# Altium PCB ArduinoUnoQ.PcbDoc
Units mil, origin at the board's own origin, x right, y up, seen from the top; angles counter-clockwise.
Board outline 2698.82 x 2101.51 mil, 2 copper layers (Top Layer, Bottom Layer), stack 62.249 mil thick; 41 components, 18 nets, 142 pads, 311 vias.
Unrouted connection lines stored in the file: 67.
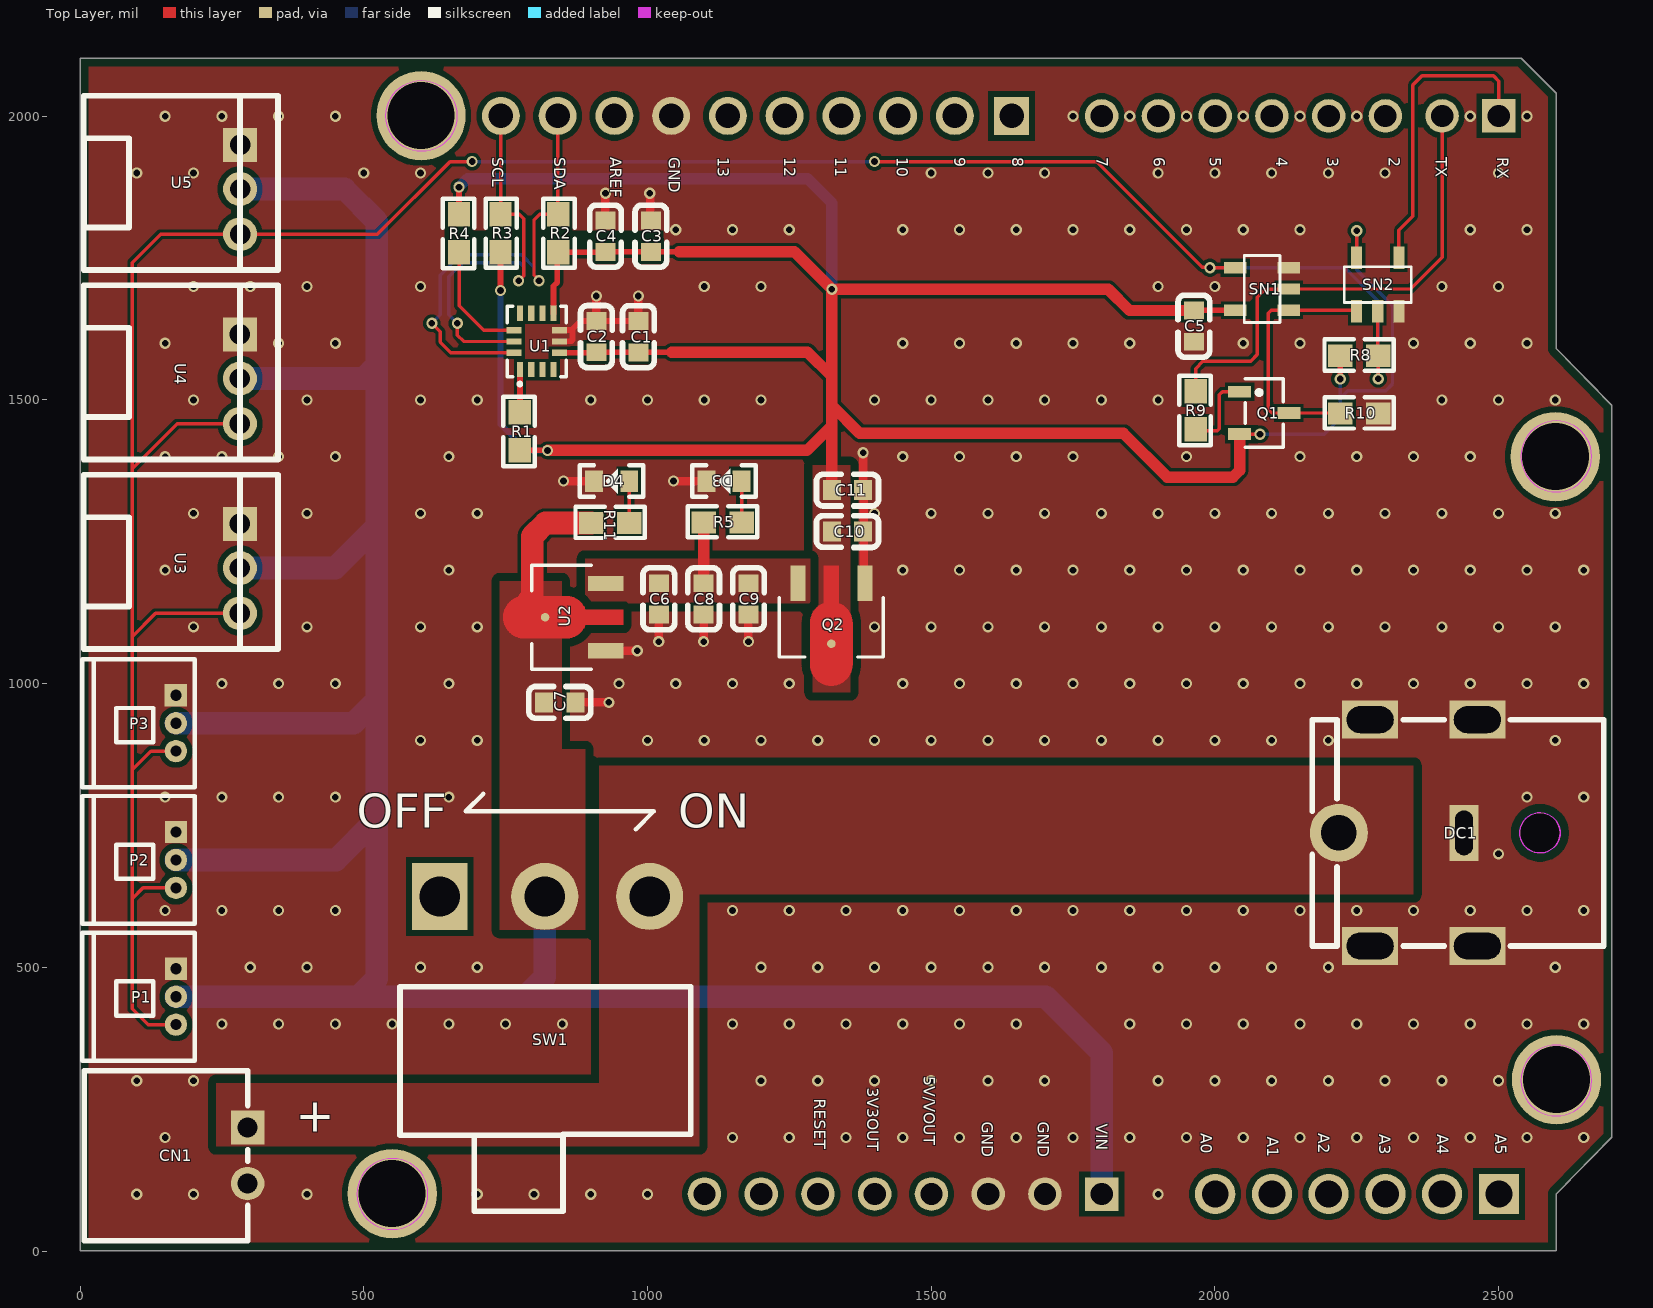
[diagram p0: Top Layer view]
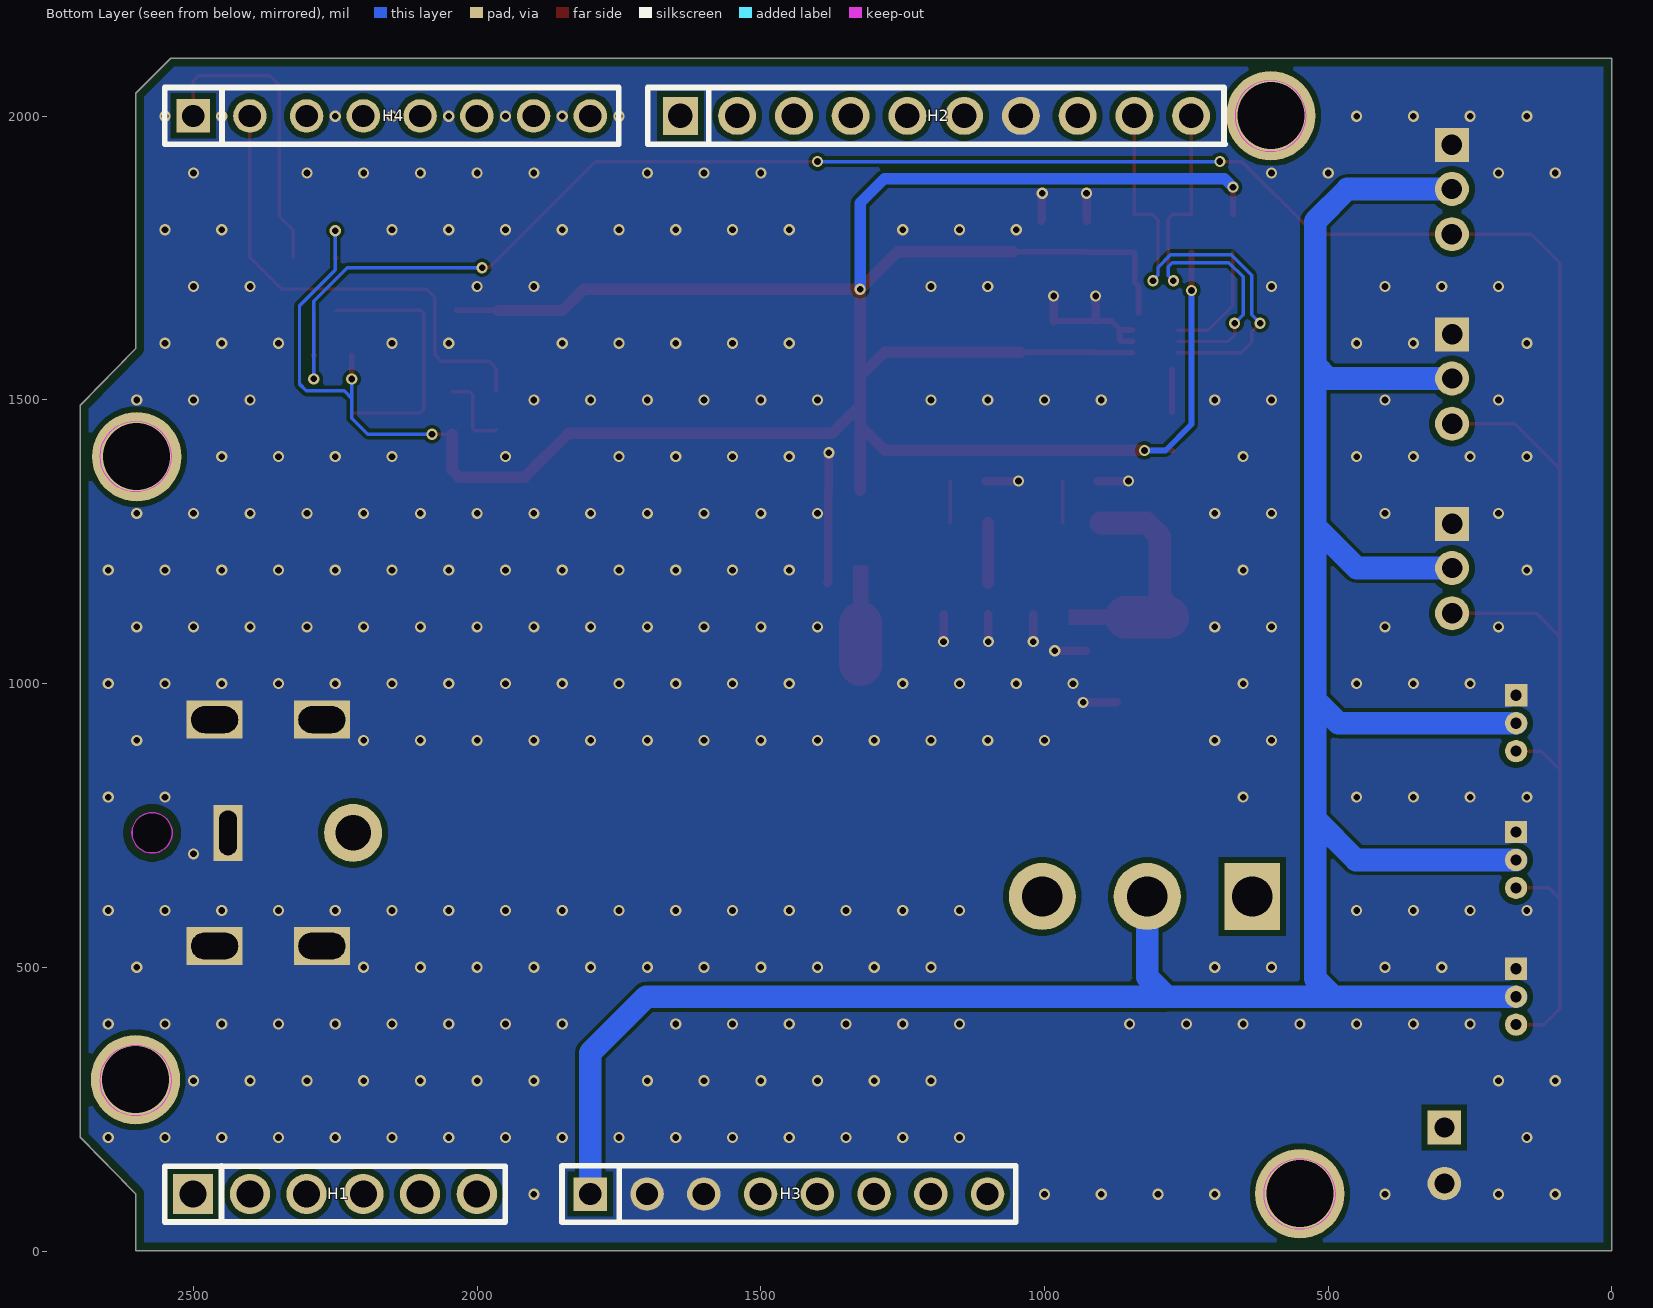
[diagram p1: Bottom Layer view, seen from below]
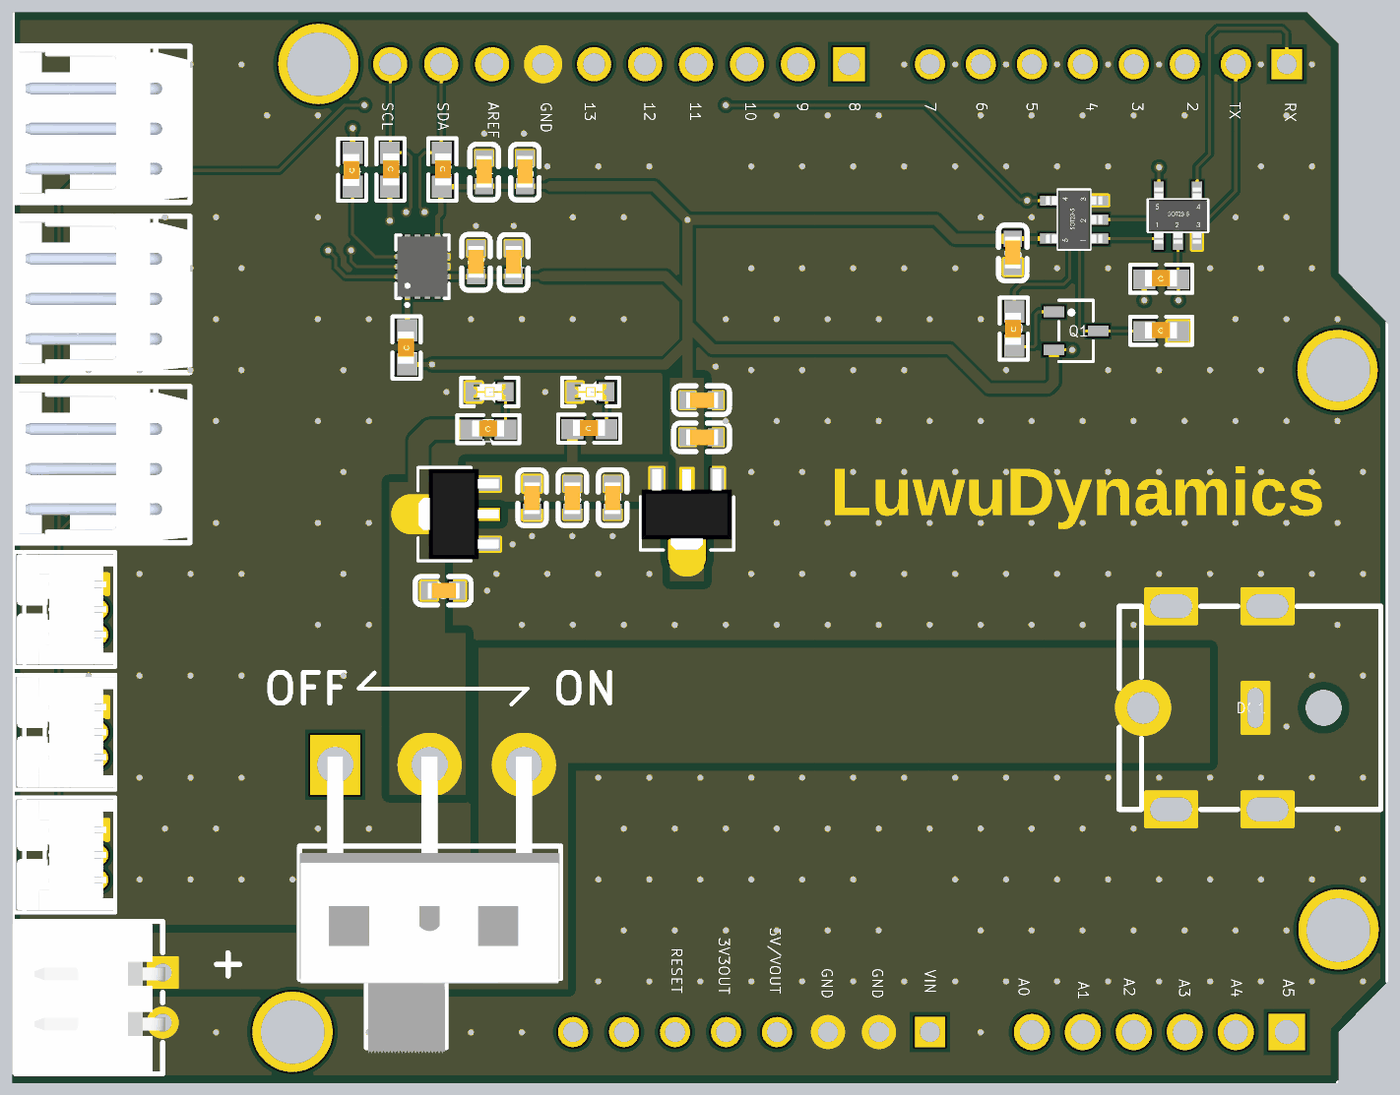
[diagram p2: 3D render of the assembled board from above, using the file's embedded part models]

## Layer stack, top to bottom
Top Solder: solder mask 0.4, Solder Resist, Dk 3.5
Top Layer: signal copper 1.4
Dielectric 1: dielectric 59.4488, FR-4, Dk 4.8
Bottom Layer: signal copper 1.4
Bottom Solder: solder mask 0.4, Solder Resist, Dk 3.5

## Board outline
0.5,0.5 0.5,2102.01 2540.08,2102.01 2601.68,2040.41 2601.68,1590.5 2699.32,1490.5 2699.32,200.5 2601.68,100.5 2601.68,0.5
cut-out: 2539.18,1400.5 ccw(c2601.68,1400.5) 2601.68,1338 ccw(c2601.68,1400.5) 2664.18,1400.5 ccw(c2601.68,1400.5) 2601.68,1463 ccw(c2601.68,1400.5)
cut-out: 2539.18,300.5 ccw(c2601.68,300.5) 2601.68,238 ccw(c2601.68,300.5) 2664.18,300.5 ccw(c2601.68,300.5) 2601.68,363 ccw(c2601.68,300.5)
cut-out: 488,100.5 ccw(c550.5,100.5) 550.5,38 ccw(c550.5,100.5) 613,100.5 ccw(c550.5,100.5) 550.5,163 ccw(c550.5,100.5)
cut-out: 601.68,1938 cw(c601.68,2000.5) 539.18,2000.5 cw(c601.68,2000.5) 601.68,2063 cw(c601.68,2000.5) 664.18,2000.5 cw(c601.68,2000.5)

## Design rules (kind name [scope] priority, off if disabled: settings)
BoardOutlineClearance [All] p1: gap=15 ignorepadtopadclearanceinfootprint=FALSE
Clearance [All] p1: gap=6 ignorepadtopadclearanceinfootprint=FALSE except(10: THPad-Fill THPad-Poly THPad-Region; 15: Fill-Fill Fill-Poly Fill-Region Poly-Poly Poly-Region Region-Region)
MinimumSolderMaskSliver [All] p1: minsoldermaskwidth=0
PolygonConnect [All] p1: connectstyle=Direct reliefconductorwidth=10 reliefentries=4 polygonreliefangle="90 Angle" airgapwidth=10
RoutingVias [All] p1: holewidth=11.81 width=19.68 viastyle="Through Hole" minholewidth=7.87 minwidth=19.68 maxholewidth=28 maxwidth=50
SilkToSilkClearance [All] p1: silktosilkclearance=0
SilkToSolderMaskClearance [IsPad] p1: minsilkscreentomaskgap=0 clearancetoexposedcopper=TRUE
SolderMaskExpansion SolderMask_Pad [IsPad] p1: expansion=4 istentingtop=FALSE
SolderMaskExpansion SolderMask_Via_Tenting [IsVia] p2: expansion=0 istentingtop=TRUE
SolderMaskExpansion [All] p3: expansion=4 istentingtop=FALSE
SupplyNets "Schematic Supply Nets_4" [InNet('VCC8.4V')] p1: voltage=0.000
SupplyNets "Schematic Supply Nets_3" [InNet('Power')] p2: voltage=0.000
SupplyNets "Schematic Supply Nets_2" [InNet('GND')] p3: voltage=0.000
SupplyNets "Schematic Supply Nets_1" [InNet('VCC5V')] p4: voltage=0.000
SupplyNets "Schematic Supply Nets" [InNet('VDD3V3')] p5: voltage=0.000
Width [All] p1: maxlimit=100 minlimit=6 preferedwidth=6
27 further rules are at their usual default settings.

## Classes and differential pairs
component class ArduinoUnoQ: C8 CN1 D3 D4 DC1 H1 H2 H3 H4 P1 P2 P3 Q1 Q2 SN1 SN2 SW1 U3 U4 U5

## Components (designator, comment, footprint, x,y, rotation, side; value= is the part's Value field where it differs from the comment)
C1 "0603 C" C0603#1 984,1611.44 r270 top value=10uF/25V
C2 "0603 C" C0603#1 910,1611.56 r270 top value=100nF/25V
C3 "0603 C" C0603#1 1006,1788.56 r270 top value=10uF/25V
C4 "0603 C" C0603#1 926,1788.56 r270 top value=100nF/25V
C5 "100nF/25V" C0603#2 1963,1630 r270 top
C6 "0603 C" C0603#3 1020,1149.44 r90 top value=6.8uF/25V
C7 "0603 C" C0603#3 845.56,967 r180 top value=1uF/25V
C8 "0603 C" C0603#1 1099,1149.44 r90 top value=10uF/25V
C9 "0603 C" C0603#1 1178,1149.44 r90 top value=100nF/25V
C10 "0603 C" C0603#1 1352.56,1268 r180 top value=10uF/25V
C11 "0603 C" C0603#1 1352.56,1341 r180 top value=100nF/25V
CN1 "ZX-XH2.54-2PWZ" CONN-TH_2P-P2.50_ZX-XH2.54-2PWZ 295.39,168.2 r270 top
D3 "LED/R" D_SOD_523 1134.9,1357 r180 top
D4 "LED/R" D_SOD_523 936.9,1357 r180 top
DC1 "kh-dc-007b-2.1g" DC-IN-TH_KH-DC-007B-2.1G 2340.58,737 r270 top
H1 "pz254v-11-06p" HDR-TH_6P-P2.54-V-M-1 2250.5,100.5 r180 bottom
H2 "pz254v-11-10p" HDR-TH_10P-P2.54-V-M 1191.68,2000.5 r180 bottom
H3 "pz254v-11-08p" HDR-TH_8P-P2.54-V-M 1450.5,100.5 r180 bottom
H4 "pz254v-11-08p" HDR-TH_8P-P2.54-V-M 2150.5,2000.5 r180 bottom
P1 "Header 3" "MX 1.25-WI-3P" 169,448.21 r270 top
P2 "Header 3" "MX 1.25-WI-3P" 169,689.21 r270 top
P3 "Header 3" "MX 1.25-WI-3P" 168.94,930.21 r270 top
Q1 "BC807" SOT-23-3 2087,1477 r180 top
Q2 "AMS1117-3.3V" SOT-89-3_L4.5-W2.5-P1.50-LS4.2-BR 1324.06,1123.61 r90 top
R1 "10K" R0603#1 775,1444.54 r90 top
R2 "4.7K/±1%" R0603#1 843,1793.54 r270 top
R3 "4.7K/±1%" R0603#1 741,1793.54 r270 top
R4 "4.7K/±1%" R0603#1 668,1793.46 r90 top
R5 "10K/±1%" R0603#2 1132.46,1284 r0 top
R8 "10K/±1%" R0603#1 2254.46,1578 r0 top
R9 "1K/±1%" R0603#2 1966,1481.54 r90 top
R10 "3.3K/±1%" R0603#2 2254.54,1476 r0 top
R11 "20K/±1%" R0603#1 934.46,1283 r0 top
SN1 "SN74LVC1G126" SOT_23_5 2130.49,1658 r90 top
SN2 "SN74LVC1G125" SOT_23_5 2249.6,1656 r0 top
SW1 "SS-12D06L5" SW-TH_3P-P4.70_L11.1-W12.7 819,625 r0 top
U1 "QMI8658A" LGA-14_L3.0-W2.5-P0.50-TL 805,1603 r90 top
U2 "h7651-50pr" SOT-89-3_L4.5-W2.5-P1.50-LS4.2-BR 873,1117 r0 top
U3 "292253-3" CONN-TH_3P-P2.00_TE_292253-3 281.85,1202.74 r270 top
U4 "292253-3" CONN-TH_3P-P2.00_TE_292253-3 281.85,1536.74 r270 top
U5 "292253-3" CONN-TH_3P-P2.00_TE_292253-3 282,1870.74 r270 top locked

## Footprints (in the part's own frame and the unit in brackets; to place one, negate y for a bottom-side part, rotate by r counter-clockwise, add the part's x,y. Pads: shape width x height; smd on the part's side, far side on the other; paste and mask are expansions set on the pad)
C0603#1 [mm] "C0603"
  rect 0.8x0.9 smd paste+0 mask+0.051: 1(-0.7,0) 2(0.7,0)
  silkscreen extent -1.39,-0.71 1.39,0.71, body extent -0.83,-0.4 0.77,0.4, height 0.4
C0603#2 [mm] "C0603"
  rect 0.8x0.9 smd paste+0 mask+0.102: 1(-0.7,0) 2(0.7,0)
  silkscreen extent -1.39,-0.71 1.39,0.71, body extent -0.83,-0.4 0.77,0.4, height 0.4
C0603#3 [mm] "C0603"
  rect 0.8x0.9 smd: 1(-0.7,0) 2(0.7,0)
  silkscreen extent -1.39,-0.71 1.39,0.71, body extent -0.83,-0.4 0.77,0.4, height 0.4
CONN-TH_2P-P2.50_ZX-XH2.54-2PWZ [mil]
  rect 60x59.1 hole 35.4 paste-99999 mask+2: 1(-49.2,0)
  round 59.1 hole 35.4 paste-99999 mask+2: 2(49.2,0)
  silkscreen extent -150,-288 150,0, body extent -145,-295 151,5, height 234
CONN-TH_3P-P2.00_TE_292253-3 [mil]
  rect 60x60 hole 36: 1(-78.74,0)
  round 60 hole 36: 2(-1,0) 3(78.74,0)
  silkscreen extent -165,-276 142,67, body extent -169,-279 139,68, height 157
D_SOD_523 [mm] "LED"
  rect 0.8x0.96 smd: 1(-0.79,0) 2(0.79,0)
  silkscreen extent -1.42,-0.71 1.42,0.71, body extent -0.8,-0.4 0.8,0.4, height 0.47
DC-IN-TH_KH-DC-007B-2.1G [mm]
  rect 1.7x2.5 hole 1.2 slot 2.1 at 90 deg: 2(-5.065,3.1) 2(-5.065,-1.7) 2(5.065,3.1) 2(5.065,-1.7)
  rect 2.5x1.3 hole 0.8 slot 2 at 0 deg: 3(0,2.5)
  round 2.6 hole 1.6: 4(0,-3.1)
  Keep-Out Layer board cut-out: 0.9,5.9 0.9,5.781 0.839,5.553 0.72,5.347 0.553,5.18 0.347,5.061 0.118,5 -0.118,5 -0.347,5.061 -0.553,5.18 -0.72,5.347 -0.839,5.553 -0.9,5.781 -0.9,5.9 -0.9,6.018 -0.839,6.247 -0.72,6.453 -0.553,6.62 -0.347,6.739 -0.118,6.8 0.118,6.8 0.347,6.739 0.553,6.62 0.72,6.453 0.839,6.247 0.9,6.018 0.9,5.9 0.9,5.9
  Keep-Out Layer circle w0.003: c0,5.9 r0.9
  Keep-Out Layer region: 0.9,5.9 0.9,5.781 0.839,5.553 0.72,5.347 0.553,5.18 0.347,5.061 0.118,5 -0.118,5 -0.347,5.061 -0.553,5.18 -0.72,5.347 -0.839,5.553 -0.9,5.781 -0.9,5.9 -0.9,6.018 -0.839,6.247 -0.72,6.453 -0.553,6.62 -0.347,6.739 -0.118,6.8 0.118,6.8 0.347,6.739 0.553,6.62 0.72,6.453 0.839,6.247 0.9,6.018 0.9,5.9 0.9,5.9
  Keep-Out Layer region: 0.9,5.9 0.89,5.766 0.86,5.635 0.811,5.509 0.744,5.393 0.66,5.288 0.561,5.196 0.45,5.12 0.329,5.062 0.2,5.022 0.067,5.002 -0.067,5.002 -0.2,5.022 -0.329,5.062 -0.45,5.12 -0.561,5.196 -0.66,5.288 -0.744,5.393 -0.811,5.509 -0.86,5.635 -0.89,5.766 -0.9,5.9 -0.89,6.034 -0.86,6.165 -0.811,6.29 -0.744,6.407 -0.66,6.512 -0.561,6.604 -0.45,6.679 -0.329,6.738 -0.2,6.777 -0.067,6.797 0.067,6.797 0.2,6.777 0.329,6.738 0.45,6.679 0.561,6.604 0.66,6.512 0.744,6.407 0.811,6.29 0.86,6.165 0.89,6.034 0.9,5.9
  silkscreen extent -5.07,-4.29 5.06,8.75, body extent -5.01,-4.29 5,8.71, height 10.08
HDR-TH_6P-P2.54-V-M-1 [mm]
  rect 1.8x1.8 hole 1.2 mask+0.102: 1(-6.35,0)
  round 1.8 hole 1.2 mask+0.102: 2(-3.81,0) 3(-1.27,0) 4(1.27,0) 5(3.81,0) 6(6.35,0)
  silkscreen extent -7.62,-1.25 7.62,1.25
HDR-TH_8P-P2.54-V-M [mm]
  rect 1.5x1.5 hole 1 mask+0.102: 1(-8.89,0)
  round 1.5 hole 1 mask+0.102: 2(-6.35,0) 3(-3.81,0) 4(-1.27,0) 5(1.27,0) 6(3.81,0) 7(6.35,0) 8(8.89,0)
  silkscreen extent -10.16,-1.27 10.16,1.27
HDR-TH_10P-P2.54-V-M [mm]
  rect 1.575x1.7 hole 1.1 mask+0.102: 1(-11.43,0)
  round 1.7 hole 1.1 mask+0.102: 2(-8.89,0) 3(-6.35,0) 4(-3.81,0) 5(-1.27,0) 6(1.27,0) 7(3.81,0) 8(6.35,0) 9(8.89,0) 10(11.43,0)
  silkscreen extent -12.9,-1.27 12.95,1.27
LGA-14_L3.0-W2.5-P0.50-TL [mm] "ICM42670六轴陀螺仪"
  rect 0.675x0.28 smd paste+0 mask+0.051: 1(-1.262,0.75) 2(-1.262,0.25) 3(-1.262,-0.25) 4(-1.262,-0.75) 8(1.262,-0.75) 9(1.262,-0.25) 10(1.262,0.25) 11(1.262,0.75)
  rect 0.28x0.675 smd paste+0 mask+0.051: 5(-0.5,-1.012) 6(0,-1.012) 7(0.5,-1.012) 12(0.5,1.012) 13(0,1.012) 14(-0.5,1.012)
  silkscreen extent -1.98,-1.33 1.58,1.33, body extent -1.5,-1.25 1.5,1.25, height 0.91
"MX 1.25-WI-3P" [mm] "长：5.5mm，宽：1.8mm，高：3.3mm"
  rect 1x1 hole 0.5: 1(-1.25,0)
  round 1 hole 0.5: 2(0,0) 3(1.25,0)
  silkscreen extent -2.86,-4.19 2.86,0.85, body extent -2.75,-4.05 2.75,0.85, height 3.35
R0603#1 [mm] "贴片电阻"
  rect 1.1x1 smd: 1(-0.85,0) 2(0.85,0)
  silkscreen extent -1.56,-0.67 1.54,0.73, body extent -0.81,-0.34 0.79,0.47, height 0.88
R0603#2 [mm] "贴片电阻"
  rect 1.1x1 smd mask+0.102: 1(-0.85,0) 2(0.85,0)
  silkscreen extent -1.56,-0.67 1.54,0.73, body extent -0.81,-0.34 0.79,0.47, height 0.88
SOT-23-3 [mil] "MMBT2907A"
  rect 40.85x20.95 smd paste+0 mask+4: 1(43.36,-37.4) 2(43.36,37.4) 3(-43.36,0)
  silkscreen extent -34,-60 34,60, body extent -33,-58 20,58, height 10
SOT-89-3_L4.5-W2.5-P1.50-LS4.2-BR [mm]
  rect 1.575x0.672 smd: 1(1.356,-1.5) 3(1.356,1.5)
  round 0.38 smd: 2(-1.356,0)
  Top Layer region: -2.283,0.95 -0.429,0.95 -0.384,0.949 -0.34,0.946 -0.296,0.94 -0.252,0.933 -0.208,0.924 -0.165,0.912 -0.123,0.899 -0.081,0.884 -0.04,0.866 0,0.847 0.04,0.826 0.078,0.803 0.115,0.779 0.151,0.752 0.185,0.724 0.219,0.695 0.251,0.664 0.281,0.631 0.31,0.597 0.337,0.562 0.362,0.525 0.386,0.488 0.408,0.449 0.428,0.409 0.447,0.33 2.144,0.33 2.144,-0.33 0.447,-0.33 0.428,-0.409 0.408,-0.449 0.386,-0.488 0.362,-0.526 0.337,-0.562 0.31,-0.597 0.281,-0.631 0.251,-0.664 0.219,-0.695 0.185,-0.725 0.151,-0.753 0.115,-0.779 0.078,-0.804 0.04,-0.827 0,-0.848 -0.04,-0.867 -0.081,-0.884 -0.123,-0.899 -0.165,-0.913 -0.208,-0.924 -0.252,-0.934 -0.296,-0.941 -0.34,-0.946 -0.384,-0.949 -0.429,-0.95 -2.283,-0.95 -2.328,-0.949 -2.372,-0.946 -2.416,-0.941 -2.46,-0.934 -2.504,-0.924 -2.547,-0.913 -2.589,-0.899 -2.631,-0.884 -2.672,-0.867 -2.713,-0.848 -2.752,-0.827 -2.79,-0.804 -2.827,-0.779 -2.863,-0.753 -2.898,-0.725 -2.931,-0.695 -2.963,-0.664 -2.993,-0.631 -3.022,-0.597 -3.049,-0.562 -3.075,-0.526 -3.098,-0.488 -3.12,-0.449 -3.141,-0.409 -3.159,-0.369 -3.175,-0.327 -3.189,-0.285 -3.202,-0.242 -3.212,-0.199 -3.22,-0.155 -3.227,-0.111 -3.231,-0.067 -3.233,-0.022 -3.233,0.022 -3.231,0.067 -3.227,0.111 -3.22,0.155 -3.212,0.199 -3.202,0.242 -3.189,0.285 -3.175,0.327 -3.159,0.369 -3.141,0.409 -3.12,0.449 -3.098,0.488 -3.075,0.525 -3.049,0.562 -3.022,0.597 -2.993,0.631 -2.963,0.664 -2.931,0.695 -2.898,0.724 -2.863,0.752 -2.827,0.779 -2.79,0.803 -2.752,0.826 -2.713,0.847 -2.672,0.866 -2.631,0.884 -2.589,0.899 -2.547,0.912 -2.504,0.924 -2.46,0.933 -2.416,0.94 -2.372,0.946 -2.328,0.949 -2.283,0.95
  silkscreen extent -1.95,-2.33 0.7,2.33, body extent -1.92,-2.24 2.08,2.26, height 1.5
SOT_23_5 [mm]
  rect 0.5x1 smd mask+0.102: 1(0,0) 2(0.95,0) 3(1.9,0) 4(1.9,2.4) 5(0,2.4)
  silkscreen extent -0.55,0.4 2.45,2, body extent -0.5,-0.2 2.4,2.6, height 1.09
SW-TH_3P-P4.70_L11.1-W12.7 [mil]
  rect 98.4x118.1 hole 70.9: 1(-185.1,0)
  round 118.1 hole 70.9: 2(0,0) 3(185,0)
  silkscreen extent -255,-555 257,-159, body extent -255,-566 255,16, height 281

## Part data
C1 C2 C3 C4 C6 C7 C8 C9 C10 C11: "0603贴片电容，±10%，50V", LatestRevisionDate=17-Jul-2002, LatestRevisionNote="Re-released for DXP Platform.", PackageDescription="Radial Cap, Thru-Hole; 2 Leads; 0.3 in Pin Spacing", PackageReference=RAD-0.3, Published=8-Jun-2000, Publisher="Altium Limited"
C5: library part "0603 10nF (103) 10% 50V", "贴片电容", Package=0603, SuppliersPartNumber=C57112, ComponentLink1Description=供应商链接, ComponentLink1URL=http://www.szlcsc.com/product/details_58143.html, Supplier=LC
CN1: "插针结构:1x2P;间距:2.5mm;安装方式:弯插;参考系列:XH;总PIN数:2P;排数:1;每排PIN数:2;行距:-;额定电流:2A;触头材质:黄铜;触头镀层:锡;工作温度:-25℃~+85℃;", Color=白色, Current Rating=2A, Flame Retardant Rating=UL94V-0, JLCPCB Part Class="Extended Part", LCSC Part Name="1x2P 间距:2.5mm 弯插 系列:XH", Manufacturer=Megastar(兆星), Operating Temperature=-25℃~+85℃, Voltage Rating=250V, AddInBom=yes, Contact Material=黄铜, Contact Plating=锡, ConvertToPcb=yes, Datasheet=https://item.szlcsc.com/datasheet/ZX-XH2.54-2PWZ/8427558.html, Device=ZX-XH2.54-2PWZ, FootprintName=CONN-TH_2P-P2.50_ZX-XH2.54-2PWZ, ManufacturerPart=ZX-XH2.54-2PWZ, ModelId=24f25f0d7a3348c685f49f501f04732c聨0819f05c4eef4c71ace90d822a990e87, ModelName=CONN-TH_2P-P2.50_ZX-XH2.54-2PWZ, ModelTransform=295.669,300.7868,0,0,0,0,0,-137.795,-133.858, Mounting Type=弯插, Number of Pins=2P, Number of PINs Per Row=2, Number of Rows=1, Pins Structure=1x2P, Pitch=2.5mm, Plastic Material=PA66, Reference Series=XH, Row Spacing=-, Supplementary Features=-, Supplier=LCSC, Supplier Footprint=弯插,P=2.5mm, SupplierPart=C7429641, Symbol=ZX-XH2.54-2PWZ, X-Length of Bottom Edge on Board (Spacing Line)=7.5mm, Y-Width of Bottom Edge on Board=7.32mm, Z-Height of the Board=5.9mm
D3 D4: library part LED, "Typical INFRARED GaAs LED", LatestRevisionDate=08-Jul-2005, LatestRevisionNote="Mech Layer 1 removed.", PackageDescription="LED; 2 Leads", PackageReference=LED-0, Published=8-Jun-2000, Publisher="Altium Limited"
DC1: "连接器类型:DC电源插座;安装方式:弯插;触点内径:-;触点外径:-;额定电流:3A;额定电压:50V;工作温度:-30℃~+70℃;", Current Rating=3A, JLCPCB Part Class="Extended Part", LCSC Part Name=DC电源插座, Manufacturer=kinghelm(金航标), ManufacturerPart=KH-DC-007B-2.1G, Operating Temperature=-30℃~+70℃, Voltage Rating (Max)=50V, AddInBom=yes, Body Height=10mm, Connector Type=DC电源插座, ConvertToPcb=yes, Datasheet=https://item.szlcsc.com/datasheet/KH-DC-007B-2.1G/3043197.html, FootprintName=DC-IN-TH_KH-DC-007B-2.1G, Inside Contact Diameter=-, Length=13mm, ModelId=db467a4a132a497c9fa96d37cafb49be, ModelName=DC-IN-TH_KH-DC-007B-2.1G, ModelTransform=511.81,393.7,0,270,0,0,0,90.551,-74.803, Mounting Type=弯插, Outside Contact Diameter=-, Supplier=LCSC, Supplier Footprint=插件, SupplierPart=C2847175, Symbol=KH-DC-007B-2.1G, Width=10.85mm
H1: "插针结构:1x6P;间距:2.54mm;行距:-;圆针/方针:方针;安装方式:直插;排数:单排;总PIN位数:6P;额定电流:3A;额定电压:-;配合针长度:6mm;塑高:2.5mm;端接针长度:3mm;触头材质:黄铜;触头镀层:金;工作温度:-40℃~+105℃;颜色:黑色;", Color=黑色, Current Rating=3A, JLCPCB Part Class="Extended Part", LCSC Part Name="1x6P 间距:2.54mm 方针 直插", Manufacturer=BOOMELE(博穆精密), ManufacturerPart=2.54-1x6P直针, Operating Temperature=-40℃~+105℃, Voltage Rating (Max)=-, AddInBom=yes, Circluar Pins/Square Pins=方针, Contact Material=黄铜, Contact Plating=金, ConvertToPcb=yes, Datasheet=https://item.szlcsc.com/datasheet/2.54-1x6P%25E7%259B%25B4%25E9%2592%2588/38187.html, FootprintName=HDR-TH_6P-P2.54-V-M-1, Insulation Height=2.5mm, Length of End Connection Pin=3mm, Length of Mating Pin=6mm, ModelId=60739dffc9b04830a286435b0fefbd4a, ModelName=HDR2.54-M-LI-1X6P, ModelTransform=599.999,100,0,0,0,0,0,0,-118.11, Mounting Type=直插, Number of Pins=6P, Number of Rows=单排, Pin Structure=1x6P, Pitch=2.54mm, Row Spacing=-, Supplier=LCSC, Supplier Footprint=插件,P=2.54mm, SupplierPart=C37208, Symbol=Header-Male-2.54_1x6
H2: "插针结构:1x10P;间距:2.54mm;行距:-;圆针/方针:方针;安装方式:直插;排数:单排;总PIN位数:10P;额定电流:3A;额定电压:250V;配合针长度:6mm;塑高:2.5mm;端接针长度:3mm;触头材质:黄铜;触头镀层:-;工作温度:-40℃~+105℃;颜色:黑色;", Color=黑色, Current Rating=3A, JLCPCB Part Class="Extended Part", LCSC Part Name="1x10P 间距:2.54mm 方针 直插", Manufacturer=XFCN(兴飞), ManufacturerPart=PZ254V-11-10P, Operating Temperature=-40℃~+105℃, Voltage Rating (Max)=250V, AddInBom=yes, Circluar Pins/Square Pins=方针, Contact Material=黄铜, Contact Plating=-, ConvertToPcb=yes, Datasheet=https://item.szlcsc.com/datasheet/PZ254V-11-10P/502965.html, FootprintName=HDR-TH_10P-P2.54-V-M, Insulation Height=2.5mm, Length of End Connection Pin=3mm, Length of Mating Pin=6mm, ModelId=10f3d1cea59e4bb4ba116af9f09c2b9b, ModelName=HDR2.54-M-LI-1X10P, ModelTransform=999.99796,100,0,0,0,0,0,0,-118.11, Mounting Type=直插, Number of Pins=10P, Number of Rows=单排, Pin Structure=1x10P, Pitch=2.54mm, Row Spacing=-, Supplier=LCSC, Supplier Footprint=插件,P=2.54mm, SupplierPart=C492409, Symbol=PZ254V-11-10P
H3 H4: "插针结构:1x8P;间距:2.54mm;行距:-;圆针/方针:方针;安装方式:直插;排数:单排;总PIN位数:8P;额定电流:3A;额定电压:250V;配合针长度:6mm;塑高:2.5mm;端接针长度:3mm;触头材质:黄铜;触头镀层:-;工作温度:-40℃~+105℃;颜色:黑色;", Color=黑色, Current Rating=3A, JLCPCB Part Class="Extended Part", LCSC Part Name="1x8P 间距:2.54mm 方针 直插", Manufacturer=XFCN(兴飞), ManufacturerPart=PZ254V-11-08P, Operating Temperature=-40℃~+105℃, Voltage Rating (Max)=250V, AddInBom=yes, Circluar Pins/Square Pins=方针, Contact Material=黄铜, Contact Plating=-, ConvertToPcb=yes, Datasheet=https://item.szlcsc.com/datasheet/PZ254V-11-08P/502963.html, FootprintName=HDR-TH_8P-P2.54-V-M, Insulation Height=2.5mm, Length of End Connection Pin=3mm, Length of Mating Pin=6mm, ModelId=f5b96e27511e49e38545e53df2320202, ModelName=HDR-TH_8P-P2.54-V-M, ModelTransform=807.87244,98.425,0,0,0,0,0,0,-118.11, Mounting Type=直插, Number of Pins=8P, Number of Rows=单排, Pin Structure=1x8P, Pitch=2.54mm, Row Spacing=-, Supplier=LCSC, Supplier Footprint=插件,P=2.54mm, SupplierPart=C492407, Symbol=PZ254V-11-08P
P1 P2 P3: "Header, 3-Pin", LatestRevisionDate=17-Jul-2002, LatestRevisionNote="Re-released for DXP Platform.", Publisher="Altium Limited"
Q1: library part "PNP 60V 600mA", "三极管BJT", ComponentLink1Description="Manufacturer Link", ComponentLink1URL=http://www.fairchildsemi.com/, ComponentLink2Description=Datasheet, ComponentLink2URL=http://www.fairchildsemi.com/ds/2N%2F2N3906.pdf, DatasheetVersion=1997, LatestRevisionDate=15-Jan-2003, LatestRevisionNote="PCB Footprint 'BCY-W3/D4.7' replaced", PackageDescription="TO, Flat Index; 3 In-Line, Axial Leads; Body Dia. 4.5mm; Leads 0.51 x 0.48 mm (max)", PackageReference=TO-92A, PackageVersion=Sep-1998, Published=8-Jun-2000, Publisher="Altium Limited"
Q2: library part AMS1117-3.3V_SOT89, "输入18V 输出3.3V 1A，SOT-89封装", JLCPCB Part Class="Extended Part", LCSC Part Name="输入18V 输出3.3V 1A", Manufacturer=MSKSEMI(美森科), Operating Temperature=0℃~+125℃, Output Current=1A, Output Voltage=3.3V, standby current=12mA, Voltage - Supply=18V, Voltage Dropout=1.4V@(1A), Add into BOM=yes, Convert to PCB=yes, Datasheet=https://atta.szlcsc.com/upload/public/pdf/source/20240731/7960C38D2F7D4AC8FF3CFA386029A4C5.pdf, Device=AMS1117-3.3V_C5120796, Manufacturer Part=AMS1117-3.3V, Number of Outputs=1, Output Configuration=正极, Output Type=固定, Supplier=LCSC, Supplier Footprint=SOT-89, Supplier Part=C5120796, Symbol=AMS1117-3.3V_C5120796
R1 R2 R3 R4 R5 R8 R9 R10 R11: library part Res2_1, "Resistor", LatestRevisionDate=17-Jul-2002, LatestRevisionNote="Re-released for DXP Platform.", PackageReference=AXIAL-0.4, Published=8-Jun-2000, Publisher="Altium Limited"
SN1: "输出缓冲器"
SW1: "电路结构:单刀双掷;安装方式:-;开关颜色:黑色;额定电流:3A;额定电压:125V;工作寿命:1万次;", Actuator Color=黑色, Current Rating=3A, JLCPCB Part Class="Extended Part", LCSC Part Name="柄长5mm 卧插双档 滑动开关", Manufacturer="XKB Connection(中国星坤)", Operating Temperature=-40℃~+85℃, Voltage Rating=125V, Actuator Style=矩形柱状, AddInBom=yes, Circuit=单刀双掷, ConvertToPcb=yes, Device=SS-12D06L5, FootprintName=SW-TH_3P-P4.70_L11.1-W12.7, Length=12.95mm, Life=1万次, ManufacturerPart=SS-12D06L5, ModelId=cdc951e5f4794e0cacc9ea6ffda3ed7a聨0819f05c4eef4c71ace90d822a990e87, ModelName=SW-TH_3P-P4.70_L11.1-W12.7, ModelTransform=509.842,582.67596,0,0,0,0,0,-265.748,-145.669, Mounting Type=-, Supplier=LCSC, Supplier Footprint=插件,13x6.6mm, SupplierPart=C319015, Switch Height=6.3mm, Symbol=SS-12D06L5, Termination Style=PC引脚, Width=6.6mm
U1: "六轴陀螺仪  陀螺仪量程(MAX) ±2048dps  加速度计量程(MAX) ±16g", Symbol=QMI8658A_C3021082
U2: "输出极性:正极;工作电压:8.5V;输出电压:5V;输出电流:1A;电源纹波抑制比(PSRR):-;输出类型:固定;", JLCPCB Part Class="Extended Part", LCSC Part Name="5V 1A 8.5V", Manufacturer=Siproin(上海矽朋), ManufacturerPart=H7651-50PR, Operating Temperature=-40℃~+85℃, Output Current=1A, Output Voltage=5V, Power Supply Rejection Ratio (PSRR)=-, standby current=2uA, Voltage - Supply=8.5V, Voltage Dropout=50mV@(100mA), AddInBom=yes, ConvertToPcb=yes, Datasheet=https://item.szlcsc.com/datasheet/H7651-50PR/402216.html, Features=热关断, FootprintName=SOT-89-3_L4.5-W2.5-P1.50-LS4.2-BR, ModelId=6db690b7897d4d18a30d90c1b89525ee, ModelName=SOT-89-3_L4.3-W2.5-H1.6-LS4.1-P1.50, ModelTransform=161.417,169.291,0,180,0,0,-18.661,0,0, Noise=-, Number of Outputs=1, Output Configuration=正极, Output Type=固定, Supplier=LCSC, Supplier Footprint=SOT-89-3, SupplierPart=C411051, Symbol=H7651-50PR
U3 U4 U5: "插针结构:1x3P;间距:2mm;安装方式:弯插;总PIN数:3P;排数:1;每排PIN数:3;额定电流:4A;触头材质:黄铜;触头镀层:锡;工作温度:-40℃~+105℃;", Current Rating=4A, Flame Retardant Rating=UL94V-0, JLCPCB Part Class="Extended Part", LCSC Part Name="1x3P 间距:2mm 弯插", Manufacturer="TE Connectivity(泰科电子)", Operating Temperature=-40℃~+105℃, Voltage Rating=125V, AddInBom=yes, Contact Material=黄铜, Contact Plating=锡, ConvertToPcb=yes, Datasheet=https://item.szlcsc.com/datasheet/292253-3/552164.html, FootprintName=CONN-TH_3P-P2.00_TE_292253-3, ManufacturerPart=292253-3, ModelId=a9520a19719f44d590017de8a7a53ae9, ModelName=CONN-TH_3P-P2.00_TE_292253-3, ModelTransform=307.086,346.456,0,0,0,0,-11.81,-106.299,-125.984, Mounting Type=弯插, Number of Pins=3P, Number of PINs Per Row=3, Number of Rows=1, Pins Structure=1x3P, Pitch=2mm, Plastic Material=PA66, Supplier=LCSC, Supplier Footprint=弯插,P=2mm, SupplierPart=C532003, Symbol=292253-3, X-Length of Bottom Edge on Board (Spacing Line)=7.8mm, Y-Width of Bottom Edge on Board=8.8mm, Z-Height of the Board=4mm

## Free pads (board coordinates)
  round 157.48 hole 118.11: 0(550,101) 0(601,2001) 0(2600,1400) 0(2602,302)

## Via types
v1: diameter 19.68, hole 11.81, Top Layer to Bottom Layer, tented both sides, 311 vias

## Nets (pads, with @x,y where several pads share a name; then routed paths per layer and width w, separated by ;. In a path a pad name is that pad's centre, name@x,y a point inside that pad or via, vN(x,y) a via of type N, cw(c..) or ccw(c..) an arc to the next point about the centre after c; other vN are vias at no path point)
GND: C1.1 C2.1 C3.1 C4.1 C5.2 C6.1 C7.1 C8.1 C9.1 C10.1 C11.1 CN1.2 D3.2 D4.2 DC1.2 DC1.3 H2.7 H3.2 H3.3 P1.1 P2.1 P3.1 Q2.1 R10.2 SN1.3 SN2.3 U1.6 U1.7 U2.1 U3.1 U4.1 U5.1 | length 976.1
  Top Layer w10: U1.6 845.37,1603.51 865.69,1603.51 868,1605.81 868,1621.39 866.2,1623.2 ; U1.7 845.37,1623.2 866.2,1623.2 ; C1.1 983.88,1639.12 C2.1 882.12,1639.12 866.2,1623.2
  Top Layer w15: v1(852,1357) D4.2 ; C7.1 v1(932,967) ; C2.1 v1(910,1683) ; C4.1 v1(926,1864.16) ; U2.1 v1(981.95,1057.94) v1@982,1058 ; C1.1 v1@984,1681 ; v1(1004,1864.16) 1004.9,1863.26 1004.9,1817.22 C3.1 ; v1(1020,1074) C6.1 ; v1(1046,1357) D3.2 ; v1@1099,1072 C8.1 ; v1@1178,1072 C9.1 ; v1(1380.12,1406.88) C11.1 1381.62,1339.51 1381.62,1178.49 Q2.1
  other v1: 100,100 200,100 400,100 700,100 800,100 900,100 1000,100 1900,100 150,200 1150,200 1250,200 1350,200 1450,200 1550,200 1650,200 1750,200 1850,200 1950,200 2050,200 2150,200 2250,200 2350,200 2450,200 2550,200 2650,200 100,300 200,300 1200,300 1300,300 1400,300 1500,300 1600,300 1700,300 1900,300 2000,300 2100,300 2200,300 2300,300 2400,300 2500,300 250,400 350,400 450,400 550,400 650,400 750,400 850,400 1150,400 1250,400 1350,400 1450,400 1550,400 1650,400 1850,400 1950,400 2050,400 2150,400 2250,400 2350,400 2450,400 2550,400 2650,400 300,500 400,500 600,500 700,500 1200,500 1300,500 1400,500 1500,500 1600,500 1700,500 1800,500 1900,500 2000,500 2100,500 2200,500 2600,500 150,600 250,600 350,600 450,600 1150,600 1250,600 1350,600 1450,600 1550,600 1650,600 1750,600 1850,600 1950,600 2050,600 2150,600 2250,600 2350,600 2450,600 2550,600 2650,600 2500,700 150,800 250,800 350,800 450,800 650,800 2550,800 2650,800 600,900 700,900 1000,900 1100,900 1200,900 1300,900 1400,900 1500,900 1600,900 1700,900 1800,900 1900,900 2000,900 2100,900 2200,900 2600,900 250,1000 350,1000 450,1000 650,1000 950,1000 1050,1000 1150,1000 1250,1000 1450,1000 1550,1000 1650,1000 1750,1000 1850,1000 1950,1000 2050,1000 2150,1000 2250,1000 2350,1000 2450,1000 2550,1000 2650,1000 1099,1074 1178,1074 200,1100 400,1100 600,1100 700,1100 1400,1100 1500,1100 1600,1100 1700,1100 1800,1100 1900,1100 2000,1100 2100,1100 2200,1100 2300,1100 2400,1100 2500,1100 2600,1100 150,1200 650,1200 1450,1200 1550,1200 1650,1200 1750,1200 1850,1200 1950,1200 2050,1200 2150,1200 2250,1200 2350,1200 2450,1200 2550,1200 2650,1200 200,1300 400,1300 600,1300 700,1300 1400,1300 1500,1300 1600,1300 1700,1300 1800,1300 1900,1300 2000,1300 2100,1300 2200,1300 2300,1300 2400,1300 2500,1300 2600,1300 150,1400 250,1400 350,1400 450,1400 650,1400 1450,1400 1550,1400 1650,1400 1750,1400 1950,1400 2150,1400 2250,1400 2350,1400 2450,1400 200,1500 400,1500 600,1500 700,1500 900,1500 1000,1500 1100,1500 1200,1500 1400,1500 1500,1500 1600,1500 1700,1500 1800,1500 1900,1500 2400,1500 2500,1500 2600,1500 150,1600 350,1600 450,1600 1450,1600 1550,1600 1650,1600 1750,1600 1850,1600 2050,1600 2150,1600 2350,1600 2450,1600 2550,1600 984,1683 200,1700 300,1700 400,1700 600,1700 1100,1700 1200,1700 1900,1700 2000,1700 2400,1700 2500,1700 1050,1800 1150,1800 1250,1800 1450,1800 1550,1800 1650,1800 1750,1800 1850,1800 1950,1800 2050,1800 2150,1800 2450,1800 2550,1800 100,1900 200,1900 500,1900 600,1900 1500,1900 1600,1900 1700,1900 1900,1900 2000,1900 2100,1900 2200,1900 2300,1900 2500,1900 150,2000 250,2000 350,2000 450,2000 1750,2000 1850,2000 1950,2000 2050,2000 2150,2000 2250,2000 2450,2000 2550,2000
NetD1_2: 
NetD2_2: 
NetD3_1: D3.1 R5.2 | length 73
  Top Layer w6: R5.2 1166,1284.07 D3.1
NetD4_1: D4.1 R11.2 | length 74
  Top Layer w6: R11.2 967.93,1356.93 D4.1
NetQ1_1: Q1.1 R9.1 | length 141.7
  Top Layer w6: R9.1 1968.07,1446 2004.49,1446 2008,1449.51 2008,1509 2013.4,1514.4 Q1.1
NetR1_2: R1.2 U1.1 | length 75.5
  Top Layer w6: R1.2 R1.2@775.47,1478.47
  Top Layer w10: R1.2@775.47,1478.47 U1.1
NetR4_1: R4.1 U1.12 | length 209.1
  Top Layer w6: R4.1 668,1666 711.32,1622.68 U1.12
Power: CN1.1 DC1.4 SW1.3
RX0: H4.1 SN2.4 | length 537.8
  Top Layer w6: SN2.4 2324.4,1799.4 2349,1824 2349,2055 2365,2071 2491,2071 2500.5,2061.5 H4.1
SCL: H2.10 R3.1 U1.13 | length 719.1
  Top Layer w6: v1(665,1635) 665,1614 676.01,1602.99 U1.13 ; H2.10 741.68,1827.68 R3.1 774,1827 782,1819 782,1719 v1(773,1710)
  Bottom Layer w6: v1(665,1635) 650,1650 650,1717 675,1742 775.03,1742 782,1735.03 782,1719 v1(773,1710) v1@773,1710.36
SDA: H2.9 R2.1 U1.14 | length 817
  Top Layer w6: v1(620,1635) 635,1620 635,1602 653.68,1583.32 U1.14 ; v1(809,1710) 809,1711.36 800,1720.36 800,1817 810,1827 R2.1 841.68,1828.32 H2.9
  Bottom Layer w6: v1(620,1635) 635,1650 635,1720 671,1756 778,1756 800,1734 800,1720.36 809,1711.36 v1(809,1710)
SIGNAL: P1.3 P2.3 P3.3 R8.2 SN1.4 SN2.2 U3.3 U4.3 U5.3 | length 4681.1
  Top Layer w6: P3.3 125,881 92,848 ; P1.3 120,399 92,427 92,621 ; P2.3 111,640 92,621 ; U3.3 133,1124 92,1083 ; U4.3 171,1458 92,1379 ; v1(691,1920) 652,1920 524,1792 U5.3 142,1792 92,1742 92,1379 ; v1(1400,1920) 1792,1920 1977.87,1734.13 1989.87,1734.13 v1(1991.2,1732.8) SN1.4 ; R8.2@2287,1578.93 SN2.2 ; v1(2287.93,1537.07) R8.2 ; 92,621 92,848 ; 92,848 92,1083 ; 92,1083 92,1379
  Top Layer w10: R8.2@2287,1578.93 R8.2
  Bottom Layer w6: v1(691,1920) v1(1400,1920) ; v1(1991.2,1732.8) 2229.2,1732.8 2287.93,1674.07 v1(2287.93,1537.07)
TX0: H4.2 R9.2 SN1.2 | length 864.1
  Top Layer w6: R9.2 1966,1555 1979,1568 2063,1568 2075,1580 2075,1681 2089,1695 2130.09,1695 SN1.2 2344.4,1695.4 2400.5,1751.5 H4.2
TXEN: Q1.3 R10.1 SN1.1 SN2.1 | length 458.5
  Top Layer w6: R10.1 2220.07,1477 Q1.3 2100,1477 2094,1483 2094,1653 2099,1658 SN1.1 2247.6,1658 SN2.1
VCC5V: C6.2 C8.2 C9.2 Q2.3 R5.1 U2.3 | length 107
  Top Layer w20: C8.2 R5.1
VCC8.4V: C7.2 H3.1 P1.2 P2.2 P3.2 R11.1 SW1.2 U2.2 U3.2 U4.2 U5.2 | length 5265.3
  Top Layer w40: 790,1145 797,1152 797,1259.57 820.43,1283 R11.1
  Bottom Layer w40: P3.2 482.21,930.21 523,971 ; P1.2 491.21,448.21 ; P2.2 451.21,689.21 523,761 ; U3.2 449.74,1203.74 523,1277 ; U4.2 499.57,1537.74 523,1561.17 ; U5.2 466.26,1871.74 523,1815 523,1561.17 ; SW1.2 819,483 784.21,448.21 ; H3.1 1800.5,349.5 1701.79,448.21 784.21,448.21 ; 491.21,448.21 784.21,448.21 ; 491.21,448.21 523,480 523,761 ; 523,761 523,971 ; 523,971 523,1277 ; 523,1277 523,1561.17
VDD3V3: C1.2 C2.2 C3.2 C4.2 C5.1 C10.2 C11.2 Q1.2 Q2.2 R1.1 R2.2 R3.2 R4.2 R8.1 SN1.5 SN2.5 U1.5 U1.8 | length 5640.9
  Top Layer w6: Q1.2 v1(2079.6,1439.6) ; SN2.5@2249.8,1750.69 v1@2249.8,1799.8
  Top Layer w10: R4.2 v1(668,1875) ; v1(741,1693) R3.2 ; R1.1 823.93,1411.07 v1(824,1411) ; U1.8 834.53,1700.53 841,1707 841,1758.07 R2.2 925.07,1760.07 C4.2 C3.2 1056,1761 ; U1.5 909.32,1583.32 C2.2 983.88,1584 C1.2 984.12,1584 1043,1584 ; C5.1 1963.44,1658 SN1.5 ; v1(2221,1537) R8.1 ; SN2.5 SN2.5@2249.8,1750.69
  Top Layer w20: v1(824,1411) 1281,1411 1325,1455 ; 1043,1584 1282,1584 1325,1541 ; 1056,1761 1259,1761 v1(1325,1695) ; C11.2 1325,1455 ; C5.1 1849.44,1657.56 1812,1695 v1(1325,1695) ; Q1.2 2043.64,1375.72 2031.92,1364 1916,1364 1839,1441 1374,1441 1325,1490 ; 1325,1455 1325,1490 ; 1325,1490 1325,1541 ; 1325,1541 v1(1325,1695)
  Bottom Layer w6: v1(2079.6,1439.6) 2192.6,1439.6 2221,1468 2221,1502.5 ; v1(2221,1537) 2221,1502.5 ; v1(2250,1798) 2250,1728.97 2313,1665.97 2313,1528 2301,1516 2234.5,1516 2221,1502.5
  Bottom Layer w10: v1(741,1693) 741,1457 787,1411 v1(824,1411)
  Bottom Layer w20: v1(668,1875) 683,1890 1282,1890 1325,1847 v1(1325,1695)
pads on no net: H1.1 H1.2 H1.3 H1.4 H1.5 H1.6 H2.1 H2.2 H2.3 H2.4 H2.5 H2.6 H2.8 H3.4 H3.5 H3.6 H3.7 H3.8 H4.3 H4.4 H4.5 H4.6 H4.7 H4.8 SW1.1 U1.2 U1.3 U1.4 U1.9 U1.10 U1.11

## Polygon pours and split planes (outlines as drawn)
GND on Top Layer "GND" (solid, remove dead copper, pour order 5): 0.5,0.5 0.5,2102.01 2540.08,2102.01 2601.68,2040.41 2601.68,1590.5 2699.32,1490.5 2699.32,200.5 2601.68,100.5 2601.68,0.5
VDD3V3 on Top Layer "VDD3V3" (solid, remove dead copper, pour order 4): 1291,1385 1357,1385 1357,985 1291,985
VCC5V on Top Layer "VCC5V" (solid, remove dead copper, pour order 3): 890,1142 1287,1142 1287,1220 890,1220
VCC8.4V on Top Layer "VCC8.4V" (solid, remove dead copper, pour order 2): 751,566 740,566 740,1180 849,1180 849,884 890,884 890,566
Power on Top Layer "Power" (solid, remove dead copper, pour order 1): 240,185 1091,185 1091,531 915,531 915,296 240,296
Power on Top Layer "Power" (solid, remove dead copper, pour order 0): 915,855 2350,855 2350,629 1091,629 1091,465 915,465
GND on Bottom Layer "GND" (solid, remove dead copper, pour order 6): 0.5,0.5 0.5,2102.01 2540.08,2102.01 2601.68,2040.41 2601.68,1590.5 2699.32,1490.5 2699.32,200.5 2601.68,100.5 2601.68,0.5

## Other copper
Top Layer:
  pour cut-out: 1940.32,1475.72 1940.32,1487.35 2008,1487.35 2008,1475.72
  pour cut-out: 809.04,1799.11 809.04,1787.49 1029,1787.49 1029,1799.11
  pour cut-out: 642.32,1799.28 642.32,1787.65 776,1787.65 776,1799.28

## Silkscreen, mask and mechanical layers (free items; w line width, h text height)
Top Overlay:
  lines w7.87: 711,806 680,775 1011,775 ; 979.69,743.61 1010.69,774.61
  text "SCL" at 726.87,1927.79 h20 r270
  text "SDA" at 835.87,1927.79 h20 r270
  text "AREF" at 934.54,1927.79 h20 r270
  text "GND" at 1037.9,1927.79 h20 r270
  text "13" at 1124,1927.79 h20 r270
  text "12" at 1241,1927.79 h20 r270
  text "11" at 1331,1927.79 h20 r270
  text "10" at 1439,1927.79 h20 r270
  text "9" at 1541,1927.79 h20 r270
  text "8" at 1643,1927.79 h20 r270
  text "7" at 1791.54,1927.79 h20 r270
  text "6" at 1892.54,1927.79 h20 r270
  text "5" at 1991,1927.79 h20 r270
  text "4" at 2108,1927.79 h20 r270
  text "3" at 2198,1927.79 h20 r270
  text "2" at 2306,1927.79 h20 r270
  text "TX" at 2388.87,1927.79 h20 r270
  text "RX" at 2497.87,1927.79 h20 r270
  text "OFF" at 488,746 h60
  text "ON" at 1054,746 h60
  text "5V/VOUT" at 1487,307.97 h20 r270
  text "3V3OUT" at 1387,287.98 h20 r270
  text "RESET" at 1294,267.99 h20 r270
  text "GND" at 1589,228 h20 r270
  text "GND" at 1688,228 h20 r270
  text "VIN" at 1791,224.67 h20 r270
  text "+" at 380,210 h60
  text "A0" at 1975,208.01 h20 r270
  text "A2" at 2182,208.01 h20 r270
  text "A3" at 2290,206 h20 r270
  text "A4" at 2392,206 h20 r270
  text "A5" at 2494,206 h20 r270
  text "A1" at 2092,201.34 h20 r270
Top Solder:
  text "LuwuDynamics" at 1605,1115.2 h150
Mechanical 1:
  circle w1: c741.68,2000.5 r10
  circle w1: c841.68,2000.5 r10
  circle w1: c941.68,2000.5 r10
  circle w1: c1041.68,2000.5 r10
  circle w1: c1141.68,2000.5 r10
  circle w1: c1241.68,2000.5 r10
  circle w1: c1341.68,2000.5 r10
  circle w1: c1441.68,2000.5 r10
  circle w1: c1541.68,2000.5 r10
  circle w1: c1641.68,2000.5 r10
  circle w1: c1800.5,2000.5 r10
  circle w1: c1900.5,2000.5 r10
  circle w1: c2000.5,2000.5 r10
  circle w1: c2100.5,2000.5 r10
  circle w1: c2200.5,2000.5 r10
  circle w1: c2300.5,2000.5 r10
  circle w1: c2400.5,2000.5 r10
  circle w1: c2500.5,2000.5 r10
  circle w1: c1100.5,100.5 r10
  circle w1: c1200.5,100.5 r10
  circle w1: c1300.5,100.5 r10
  circle w1: c1400.5,100.5 r10
  circle w1: c1500.5,100.5 r10
  circle w1: c1600.5,100.5 r10
  circle w1: c1700.5,100.5 r10
  circle w1: c1800.5,100.5 r10
  circle w1: c2000.5,100.5 r10
  circle w1: c2100.5,100.5 r10
  circle w1: c2200.5,100.5 r10
  circle w1: c2300.5,100.5 r10
  circle w1: c2400.5,100.5 r10
  circle w1: c2500.5,100.5 r10
  circle w1: c550.5,100.5 r62.5
  circle w1: c2601.68,300.5 r62.5
  circle w1: c2601.68,1400.5 r62.5
  circle w1: c601.68,2000.5 r62.5
  lines w5: 0.5,0.5 0.5,2102.01 2540.08,2102.01 2601.68,2040.41 2601.68,1590.5 2699.32,1490.5 2699.32,200.5 2601.68,100.5 2601.68,0.5 0.5,0.5

## Dimensions
2699.32,200.5 to 0.5,0.5 on Top Overlay
2601.68,0.5 to 2540.08,2102.01 on Top Overlay